# EAGLE board UI PCB - BOARD (EAGLE 9.7.0)
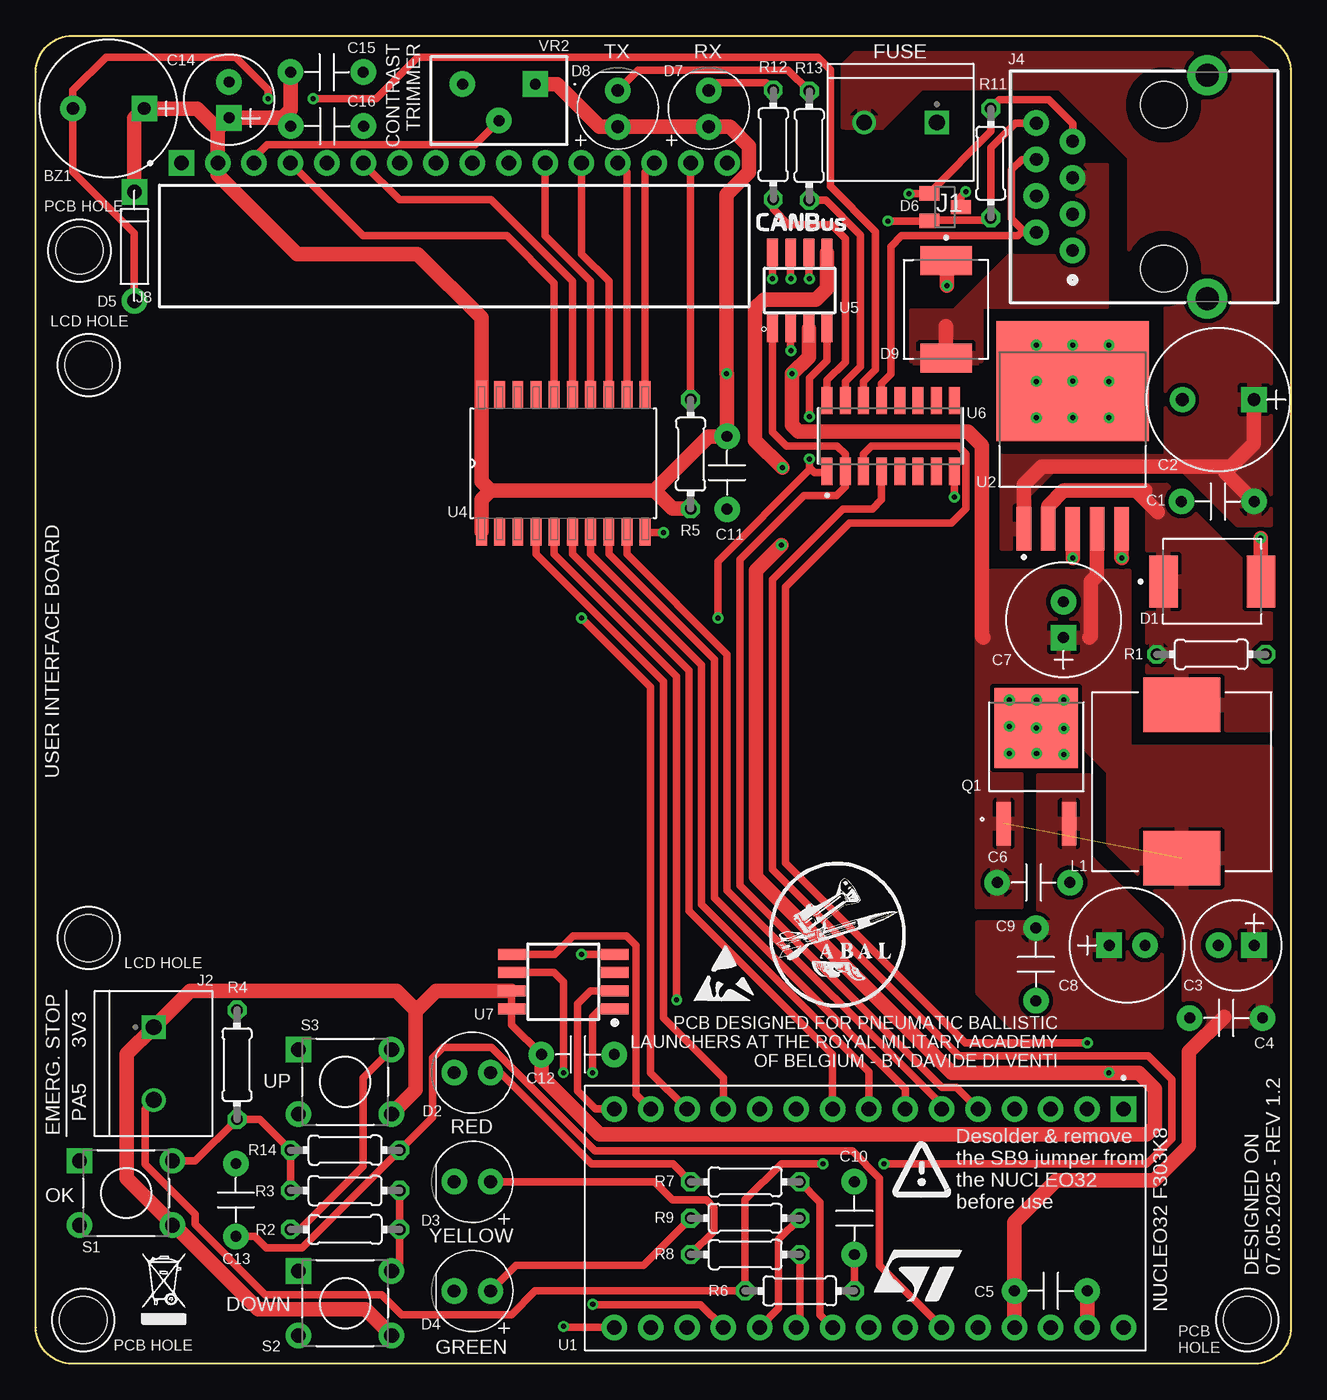
[diagram p0: board, top side]
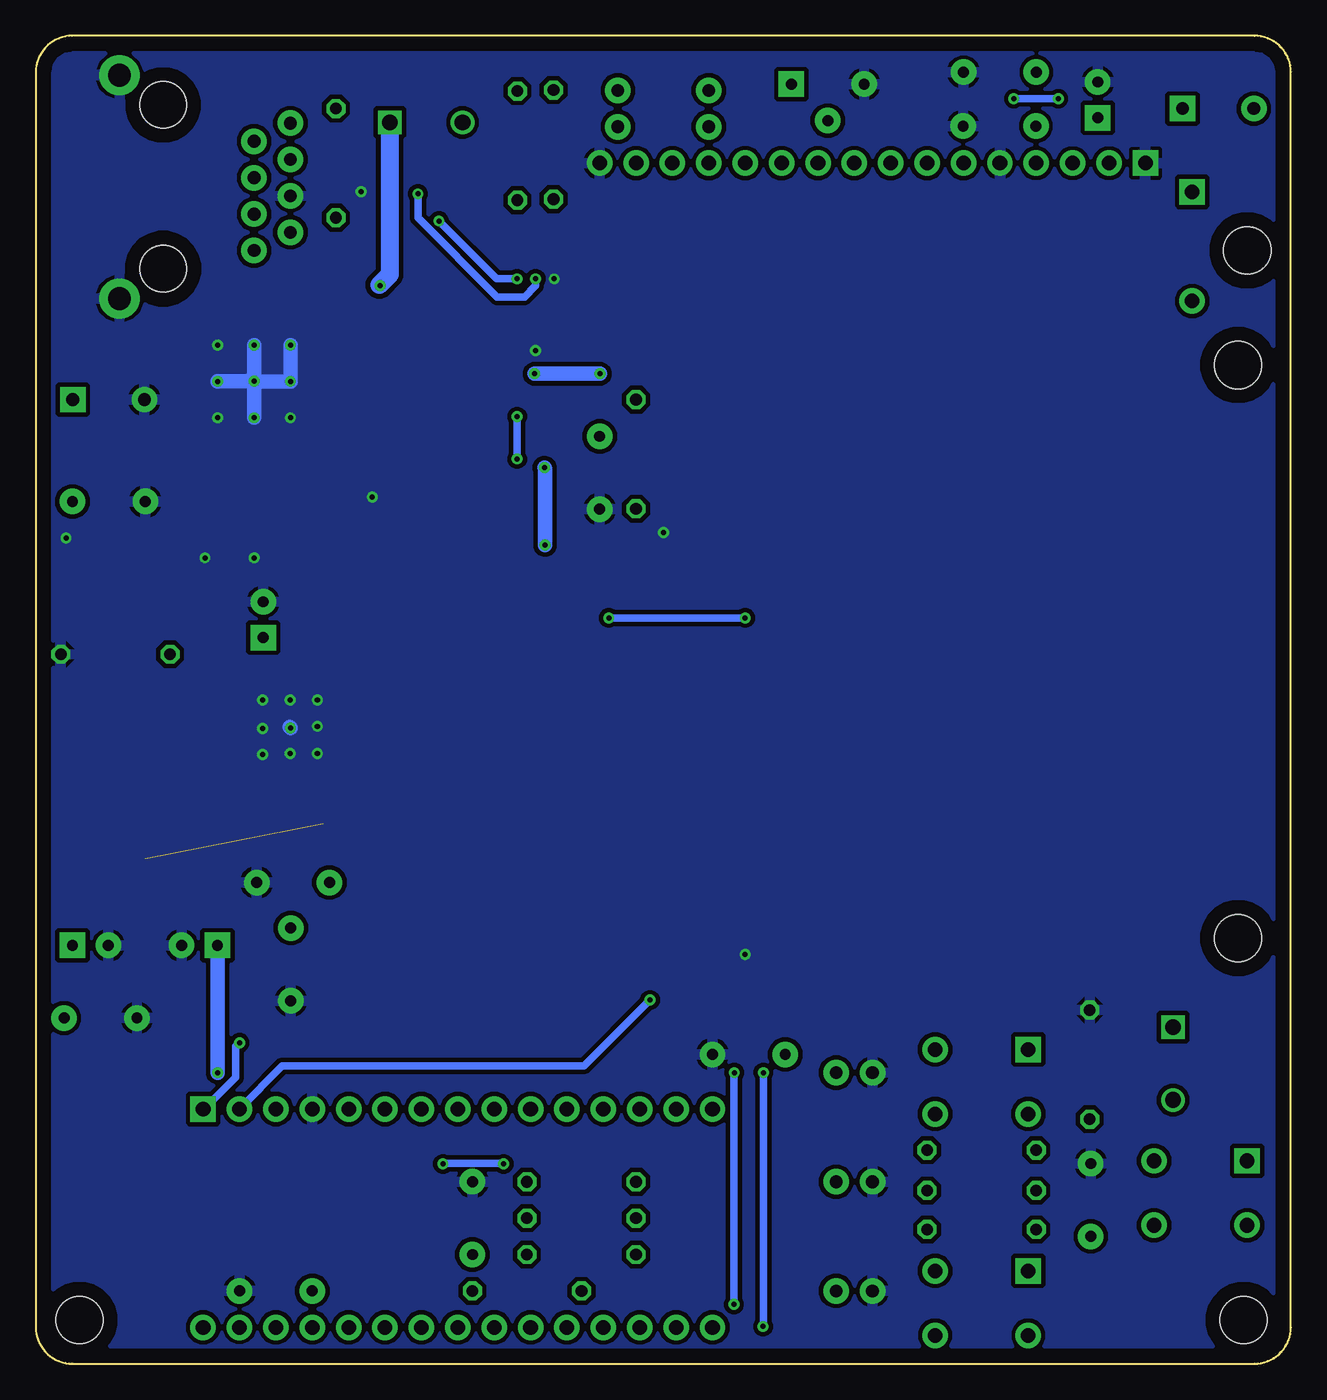
[diagram p1: board, bottom side, seen from below]

Size 87.63 x 92.71 mm. Coordinates in mm from the lower left corner, seen from the top.
Outline: 0,2.54 0,90.17 arc-90 2.54,92.71 85.09,92.71 arc-90 87.63,90.17 87.63,2.54 arc-90 85.09,0 2.54,0 arc-90 0,2.54
Copper layers (1*16): Top / Bottom
Stack-up Default Layer Stack: Top User Defined 0.035mm / Dielectric-1 User Defined 1.5mm / Bottom User Defined 0.035mm
Design rules: minimum copper width 6mil, minimum drill size 0.35mm, copper clearance wire_polygon to wire_polygon 6mil, copper clearance wire_polygon to pad_smd 6mil, copper clearance wire_polygon to via 6mil, copper clearance pad_smd to pad_smd 6mil, copper clearance pad_smd to via 6mil, copper clearance via to via 6mil, copper clearance smd to pad (same net) 6mil, copper clearance smd to via (same net) 6mil, copper clearance smd to smd (same net) 6mil, dimension clearance 40mil, via restrict clearance 0mil, restrict clearance 0mil, drill distance 6mil, keepout clearance 0mil
Holes 3.3 mm at 3.68,29.72 3.68,69.72 84.58,3.05 3.05,77.72 3.3,3.05

## Footprints (pad centres in the part's own frame; a part is rotated, then mirrored left to right if it is on the bottom)
XDCR_KSSG1201-16 = drill 0.889 pad 1.778: N 2.489,0 | drill 0.889 pad 1.778 square: P -2.489,0
CAPRR508W50L508T317H508 = drill 0.762 pad 1.778: 1 -2.54,0; 2 2.54,0
CAPPRD500W60D1000H2000 = drill 0.889 pad 1.778: N 2.5,0 | drill 0.889 pad 1.778 square: P -2.5,0
CAPPRD250W50D630H1120 = drill 0.762 pad 1.778: N 1.25,0 | drill 0.762 pad 1.778 square: P -1.25,0
CAPPRD250W45D800H500 = drill 0.762 pad 1.778: N 1.25,0 | drill 0.762 pad 1.778 square: P -1.25,0
DIO_SS34 = smd 2 x 3.6: A 3.4,0; C -3.4,0
LEDRD254W60D565H860B_R = drill 0.889 pad 1.778: A -1.27,0; C 1.27,0
LEDRD254W60D565H860B_Y = drill 0.889 pad 1.778: A -1.27,0; C 1.27,0
LEDRD254W60D565H860B_W = drill 0.889 pad 1.778: A -1.27,0; C 1.27,0
DIOAD1060W80L520D270 = drill 1.016 pad 1.778: A 3.81,0 | drill 1.016 pad 1.778 square: C -3.81,0
SOT23 = smd 1 x 1.4: 1 -0.95,-1.1; 2 0.95,-1.1; 3 0,1.1
TE_282837-2 = drill 1.1 square: 1 -2.54,0 | drill 1.1: 2 2.54,0
615008140121 = drill 0.889 pad 1.778: 1 -4.445,6.35; 2 -3.175,8.89; 3 -1.905,6.35; 4 -0.635,8.89; 5 0.635,6.35; 6 1.905,8.89; 8 4.445,8.89 | drill 0.9 pad 1.778: 7 3.175,6.35 | drill 1.6 pad 2.794: S1 -7.8,-3.05; S2 7.8,-3.05 | hole 3.25: -5.715,0; 5.715,0
SAMTEC_SSW-116-02-G-S-RA = drill 1.016 pad 1.778 square: 01 0,0 | drill 1.016 pad 1.778: 02 -2.54,0; 03 -5.08,0; 04 -7.62,0; 05 -10.16,0; 06 -12.7,0; 07 -15.24,0; 08 -17.78,0; 09 -20.32,0; 10 -22.86,0; 11 -25.4,0; 12 -27.94,0; 13 -30.48,0; 14 -33.02,0; 15 -35.56,0; 16 -38.1,0
INDP125125X600N = smd 3.81 x 5.4: 1 -5.358,0; 2 5.358,0
DPAK = smd 3.048 x 1.016: 1 -5.47,2.28; 3 -5.47,-2.28 | smd 5.588 x 5.842: 2 1.2,0
0204/7 = drill 0.813 octagon: 1 -3.81,0; 2 3.81,0
SW_FSM8JH = drill 1.016 pad 1.778 square: 1 -3.25,2.25 | drill 1.016 pad 1.778: 2 -3.25,-2.25; 3 3.25,2.25; 4 3.25,-2.25
MODULE_NUCLEO-F042K6 = drill 1.016 pad 1.778 square: CN3_1 -7.62,16.256 | drill 1.016 pad 1.778: CN3_2 -7.62,13.716; CN3_3 -7.62,11.176; CN3_4 -7.62,8.636; CN3_5 -7.62,6.096; CN3_6 -7.62,3.556; CN3_7 -7.62,1.016; CN3_8 -7.62,-1.524; CN3_9 -7.62,-4.064; CN3_10 -7.62,-6.604; CN3_11 -7.62,-9.144; CN3_12 -7.62,-11.684; CN3_13 -7.62,-14.224; CN3_14 -7.62,-16.764; CN3_15 -7.62,-19.304; CN4_1 7.62,16.256; CN4_2 7.62,13.716; CN4_3 7.62,11.176; CN4_4 7.62,8.636; CN4_5 7.62,6.096; CN4_6 7.62,3.556; CN4_7 7.62,1.016; CN4_8 7.62,-1.524; CN4_9 7.62,-4.064; CN4_10 7.62,-6.604; CN4_11 7.62,-9.144; CN4_12 7.62,-11.684; CN4_13 7.62,-14.224; CN4_14 7.62,-16.764; CN4_15 7.62,-19.304
CONV_LM2596DSADJG = smd 3.05 x 1.016: 1 -6.485,3.404; 2 -6.485,1.702; 3 -6.485,0; 4 -6.485,-1.702; 5 -6.485,-3.404 | smd 8.38 x 10.66: 6 3.82,0
SOIC127P1032X265-20N = smd 1.905 x 0.762: 1 -4.775,5.715; 2 -4.775,4.445; 3 -4.775,3.175; 4 -4.775,1.905; 5 -4.775,0.635; 6 -4.775,-0.635; 7 -4.775,-1.905; 8 -4.775,-3.175; 9 -4.775,-4.445; 10 -4.775,-5.715; 11 4.775,-5.715; 12 4.775,-4.445; 13 4.775,-3.175; 14 4.775,-1.905; 15 4.775,-0.635; 16 4.775,0.635; 17 4.775,1.905; 18 4.775,3.175; 19 4.775,4.445; 20 4.775,5.715
SOIC127P600X175-8N = smd 1.905 x 0.762: 1 -2.65,1.905; 2 -2.65,0.635; 3 -2.65,-0.635; 4 -2.65,-1.905; 5 2.65,-1.905; 6 2.65,-0.635; 7 2.65,0.635; 8 2.65,1.905
SOIC127P600X175-16N = smd 1.905 x 0.762: 1 -2.475,4.445; 2 -2.475,3.175; 3 -2.475,1.905; 4 -2.475,0.635; 5 -2.475,-0.635; 6 -2.475,-1.905; 7 -2.475,-3.175; 8 -2.475,-4.445; 9 2.475,-4.445; 10 2.475,-3.175; 11 2.475,-1.905; 12 2.475,-0.635; 13 2.475,0.635; 14 2.475,1.905; 15 2.475,3.175; 16 2.475,4.445
SOIC127P790X216-8N = smd 1.905 x 0.762: 1 -3.6,1.905; 2 -3.6,0.635; 3 -3.6,-0.635; 4 -3.6,-1.905; 5 3.6,-1.905; 6 3.6,-0.635; 7 3.6,0.635; 8 3.6,1.905
3299Y1104LF = drill 0.762 pad 1.778 square: 1 0,0 | drill 0.762 pad 1.778: 2 2.54,-2.54; 3 0,-5.08

## Placement (x,y rotation side)
BZ1  KSSG1201-16  [XDCR_KSSG1201-16]  5.08,87.63 180 top
C1  SR211C104KARTR1  [CAPRR508W50L508T317H508]  82.53,60.2 0 top
C2  ECA2CHG220  [CAPPRD500W60D1000H2000]  82.55,67.31 180 top
C3  EEUFC1E101SH  [CAPPRD250W50D630H1120]  83.82,29.21 180 top
C4  SR211C104KARTR1  [CAPRR508W50L508T317H508]  83.11,24.13 0 top
C5  SR211C104KARTR1  [CAPRR508W50L508T317H508]  70.87,5.08 180 top
C6  SR211C104KARTR1  [CAPRR508W50L508T317H508]  69.67,33.6 180 top
C7  ECEA1VKS470  [CAPPRD250W45D800H500]  71.75,51.94 90 top
C8  ECEA1VKS470  [CAPPRD250W45D800H500]  76.2,29.21 0 top
C9  SR211C104KARTR1  [CAPRR508W50L508T317H508]  69.82,27.88 90 top
C10  SR211C104KARTR1  [CAPRR508W50L508T317H508]  57.15,10.16 270 top
C11  SR211C104KARTR1  [CAPRR508W50L508T317H508]  48.26,62.2 90 top
C12  SR211C104KARTR1  [CAPRR508W50L508T317H508]  37.85,21.59 180 top
C13  SR211C104KARTR1  [CAPRR508W50L508T317H508]  13.97,11.43 270 top
C14  EEUFC1E101SH  [CAPPRD250W50D630H1120]  13.49,88.24 90 top
C15  SR211C104KARTR1  [CAPRR508W50L508T317H508]  20.32,90.17 180 top
C16  SR211C104KARTR1  [CAPRR508W50L508T317H508]  20.35,86.41 180 top
D1  SS34  [DIO_SS34]  82.14,54.61 0 top
D2  LED_RADIALRED  [LEDRD254W60D565H860B_R]  30.48,20.32 180 top
D3  LED_RADIALYELLOW  [LEDRD254W60D565H860B_Y]  30.48,12.7 180 top
D4  LED_RADIALWHITE  [LEDRD254W60D565H860B_W]  30.48,5.08 180 top
D5  1N4007  [DIOAD1060W80L520D270]  6.89,78 270 top
D6  SM712.TCT  [SOT23]  63.47,80.75 270 top
D7  LED_RADIALYELLOW  [LEDRD254W60D565H860B_Y]  46.99,87.63 90 top
D8  LED_RADIALYELLOW  [LEDRD254W60D565H860B_Y]  40.64,87.63 90 top
D9  SS34  [DIO_SS34]  63.55,73.61 270 top
J1  282837-2  [TE_282837-2]  60.38,86.66 180 top
J2  282837-2  [TE_282837-2]  8.23,20.95 270 top
J4  615008140121  [615008140121]  78.74,82.17 90 top
J8  SSW-116-02-G-S-RA  [SAMTEC_SSW-116-02-G-S-RA]  10.16,83.82 180 top
L1  SRR1260-330M  [INDP125125X600N]  80.01,40.64 90 top
Q1  LD39150DT33-R  [DPAK]  69.85,43.18 90 top
R1  10k  [0204/7]  82.07,49.53 0 top
R2  1k  [0204/7]  21.59,9.37 180 top
R3  1k  [0204/7]  21.59,12.09 0 top
R4  4.7k  [0204/7]  14.05,20.88 270 top
R5  330  [0204/7]  45.72,63.5 90 top
R6  1k  [0204/7]  53.34,5.08 180 top
R7  330  [0204/7]  49.53,12.7 0 top
R8  330  [0204/7]  49.53,7.62 0 top
R9  330  [0204/7]  49.53,10.16 0 top
R11  120  [0204/7]  66.67,83.82 270 top
R12  330  [0204/7]  51.49,85.12 90 top
R13  330  [0204/7]  54,85.04 90 top
R14  1k  [0204/7]  21.59,14.91 0 top
S1  FSM8JH  [SW_FSM8JH]  6.3,11.91 0 top
S2  FSM8JH  [SW_FSM8JH]  21.59,4.23 0 top
S3  FSM8JH  [SW_FSM8JH]  21.59,19.68 0 top
U1  NUCLEO-F042K6  [MODULE_NUCLEO-F042K6]  59.69,10.16 270 top
U2  LM2596DSADJG  [CONV_LM2596DSADJG]  72.39,64.77 90 top
U4  74HCT245D  [SOIC127P1032X265-20N]  36.83,62.87 90 top
U5  MCP2562-E/SN  [SOIC127P600X175-8N]  53.34,74.93 90 top
U6  ULN2003LVDR  [SOIC127P600X175-16N]  59.69,64.77 90 top
U7  W25Q32JVSSIQ  [SOIC127P790X216-8N]  36.83,26.67 180 top
VR2  3299Y-1-104LF  [3299Y1104LF]  34.87,89.33 270 top

## Library data of the parts
BZ1 = Buzzer; AVAILABILITY: In Stock; CHECK_PRICES: https://www.snapeda.com/parts/KSSG1201-16/Kingstate/view-part/?ref=eda; DESCRIPTION: MAGNETIC TRANSDUCER, PCB; Transducer Function:Buzzer; Supply Voltage Min:1V; Supply Voltage Max:-; Current Rating:35mA; Tones:-; Sound Level SPL:85dB; Resonant Frequency:2kHz; Transducer Mounting:-; Product Range:-; SVHC:No SVHC RoHS Compliant: Yes; MF: Kingstate; MP: KSSG1201-16; PACKAGE: None; PRICE: None; SNAPEDA_LINK: https://www.snapeda.com/parts/KSSG1201-16/Kingstate/view-part/?ref=snap
C1 C4-C6 C9-C13 C15 C16 = 100nF; AVAILABILITY: In Stock; CHECK_PRICES: https://www.snapeda.com/parts/SR211C104KARTR1/AVX/view-part/?ref=eda; DESCRIPTION: 0.1 µF ±10% 100V Ceramic Capacitor X7R Radial; MF: AVX; MP: SR211C104KARTR1; PACKAGE: Radial AVX Interconnect / Elco; PRICE: None; SNAPEDA_LINK: https://www.snapeda.com/parts/SR211C104KARTR1/AVX/view-part/?ref=snap
C2 = 680uF 35V; AVAILABILITY: In Stock; CHECK_PRICES: https://www.snapeda.com/parts/ECA2CHG220/Panasonic/view-part/?ref=eda; DESCRIPTION: Capacitor; Alum Electrolytic; Cap 22 uF; Tol 20%; Vol-Rtg 160 VDC; Radial; 10x20; Bulk; MF: Panasonic; MP: ECA2CHG220; PACKAGE: RADIAL-2 Panasonic; PRICE: None; SNAPEDA_LINK: https://www.snapeda.com/parts/ECA2CHG220/Panasonic/view-part/?ref=snap
C3 C14 = 220uF 10V; AVAILABILITY: In Stock; CHECK_PRICES: https://www.snapeda.com/parts/EEU-FC1E101SH/Panasonic/view-part/?ref=eda; DESCRIPTION: Capacitor,Alum Lytic,Cap 100 uF,Tol 20%,Vol-Rtg 25 VDC,Radial,6.3x11,Tape&Box | Panasonic Electronic Components EEU-FC1E101SH; MF: Panasonic; MP: EEU-FC1E101SH; PACKAGE: RADIAL-2 Panasonic; PRICE: None; SNAPEDA_LINK: https://www.snapeda.com/parts/EEU-FC1E101SH/Panasonic/view-part/?ref=snap
C7 C8 = 100uF 25V; AVAILABILITY: In Stock; CHECK_PRICES: https://www.snapeda.com/parts/ECE-A1VKS470/Panasonic/view-part/?ref=eda; DESCRIPTION: Capacitor,Alum Electrolytic,Cap 47 uF,Tol 20%,Vol-Rtg 35 VDC,Radial,8x5,Bulk | Panasonic Electronic Components ECE-A1VKS470; MF: Panasonic; MP: ECE-A1VKS470; PACKAGE: RADIAL-2 Panasonic; PRICE: None; SNAPEDA_LINK: https://www.snapeda.com/parts/ECE-A1VKS470/Panasonic/view-part/?ref=snap
D1 D9 = SS34; AVAILABILITY: In Stock; CHECK_PRICES: https://www.snapeda.com/parts/SS34/taiwan/view-part/?ref=eda; DESCRIPTION: 3A, 40V, Schottky Rectifier; MF: Taiwan Semiconductor; MP: SS34; PACKAGE: DO-214AB-2 Taiwan Semiconductor; PRICE: None; SNAPEDA_LINK: https://www.snapeda.com/parts/SS34/taiwan/view-part/?ref=snap
D2-D4 D7 D8 = LED
D5 = 1N4007; AVAILABILITY: In Stock; CHECK_PRICES: https://www.snapeda.com/parts/1N4007/Diotec/view-part/?ref=eda; DESCRIPTION: Diode, DO-41, 1000V, 1A, 175°C; MF: Diotec Semiconductor; MP: 1N4007; PACKAGE: DO-41 Diotec; PRICE: None; SNAPEDA_LINK: https://www.snapeda.com/parts/1N4007/Diotec/view-part/?ref=snap
D6 = SM712; AVAILABILITY: In Stock; CHECK_PRICES: https://www.snapeda.com/parts/SM712.TCT/Semtech/view-part/?ref=eda; DESCRIPTION: SM Series 12 V 400 W Asymmetrical TVS Diode for Extended Common-Mode - SOT-23; MF: Semtech Corporation; MP: SM712.TCT; PACKAGE: SOT-23 Semtech; PRICE: None; SNAPEDA_LINK: https://www.snapeda.com/parts/SM712.TCT/Semtech/view-part/?ref=snap
J1 J2 = 282837-2; AVAILABILITY: In Stock; CHECK_PRICES: https://www.snapeda.com/parts/282837-2/TE+Connectivity+AMP+Connectors/view-part/?ref=eda; COMMENT: 282837-2; DESCRIPTION: Terminal Block Connector Wire Receptacle 2 5.08 mm 30-16 AWG Green 13.5 A 250 V | TE Connectivity 282837-2; MF: TE Connectivity; MP: 282837-2; PACKAGE: None; PRICE: None; SNAPEDA_LINK: https://www.snapeda.com/parts/282837-2/TE+Connectivity+AMP+Connectors/view-part/?ref=snap
J4 = Ethernet connector; AVAILABILITY: In Stock; CHECK_PRICES: https://www.snapeda.com/parts/615008140121/Wurth+Electronics/view-part/?ref=eda; DESCRIPTION: ModularJack_8P8C_THT_Horizontal_Shielded_Tab Down; MF: Wurth Elektronik; MP: 615008140121; PACKAGE: None; PRICE: None; SNAPEDA_LINK: https://www.snapeda.com/parts/615008140121/Wurth+Electronics/view-part/?ref=snap
J8 = Header 16 positions right angle; AVAILABILITY: In Stock; CHECK_PRICES: https://www.snapeda.com/parts/SSW-116-02-G-S-RA/Samtec+Inc./view-part/?ref=eda; DESCRIPTION: 16 Position Receptacle Connector 0.100 (2.54mm) Through Hole, Right Angle Gold; MF: Samtec Inc.; MP: SSW-116-02-G-S-RA; PACKAGE: None; PRICE: None; SNAPEDA_LINK: https://www.snapeda.com/parts/SSW-116-02-G-S-RA/Samtec+Inc./view-part/?ref=snap
L1 = 33uH 3A; AVAILABILITY: In Stock; CHECK_PRICES: https://www.snapeda.com/parts/SRR1260-330M/Bourns/view-part/?ref=eda; DESCRIPTION: 33 µH Shielded Drum Core, Wirewound Inductor 3 A 60mOhm Max Nonstandard; MF: Bourns - J.W. Miller; MP: SRR1260-330M; PACKAGE: Nonstandard Bourns - J.W. Miller; PRICE: None; SNAPEDA_LINK: https://www.snapeda.com/parts/SRR1260-330M/Bourns/view-part/?ref=snap
Q1 = 3V3 regulator; AVAILABILITY: In Stock; CHECK_PRICES: https://www.snapeda.com/parts/IPB60R165CP/Infineon/view-part/?ref=eda; DESCRIPTION: N-Channel 600 V 21A (Tc) 192W (Tc) Surface Mount PG-TO263-3-2; MF: Infineon; MP: IPB60R165CP; PACKAGE: TO-263 Infineon; PRICE: None; SNAPEDA_LINK: https://www.snapeda.com/parts/IPB60R165CP/Infineon/view-part/?ref=snap
R1-R9 R11-R14 = rcl; SPICEPREFIX: R
S1-S3 = Button; AVAILABILITY: In Stock; CHECK_PRICES: https://www.snapeda.com/parts/FSM8JH/TE+Connectivity+ALCOSWITCH+Switches/view-part/?ref=eda; DESCRIPTION: Switch,Pushbutton,Tactile,SPST,Thru Hole,Vertical,6MM,Black | TE Connectivity FSM8JH; MF: TE Connectivity; MP: FSM8JH; PACKAGE: None; PRICE: None; SNAPEDA_LINK: https://www.snapeda.com/parts/FSM8JH/TE+Connectivity+ALCOSWITCH+Switches/view-part/?ref=snap
U1 = NUCLEO-F303K8; AVAILABILITY: In Stock; CHECK_PRICES: https://www.snapeda.com/parts/NUCLEO-F042K6/STMicroelectronics/view-part/?ref=eda; DESCRIPTION: STM32F042K6, mbed-Enabled Development Nucleo-32 STM32F0 ARM® Cortex®-M0 MCU 32-Bit Embedded Evaluation Board; MF: STMicroelectronics; MP: NUCLEO-F042K6; PACKAGE: None; PRICE: None; SNAPEDA_LINK: https://www.snapeda.com/parts/NUCLEO-F042K6/STMicroelectronics/view-part/?ref=snap
U2 = LM2596; AVAILABILITY: In Stock; CHECK_PRICES: https://www.snapeda.com/parts/LM2596DSADJG/Onsemi/view-part/?ref=eda; DESCRIPTION: LM2596DSADJG Switching Regulator 3A Adjustable, 1.23 to 37 V, 5-Pin D2PAK | ON Semiconductor LM2596DSADJG; MF: ON Semiconductor; MP: LM2596DSADJG; PACKAGE: D2PAK-5 ON Semiconductor; PRICE: None; SNAPEDA_LINK: https://www.snapeda.com/parts/LM2596DSADJG/Onsemi/view-part/?ref=snap
U4 = 74HCT245D; AVAILABILITY: In Stock; CHECK_PRICES: https://www.snapeda.com/parts/74HCT245D/Toshiba/view-part/?ref=eda; DESCRIPTION: Transceiver, Non-Inverting 1 Element 8 Bit per Element 3-State Output 20-SOIC; MF: Toshiba; MP: 74HCT245D; PACKAGE: SO-20 NXP Semiconductors; PRICE: None; SNAPEDA_LINK: https://www.snapeda.com/parts/74HCT245D/Toshiba/view-part/?ref=snap
U5 = MCP2562; AVAILABILITY: In Stock; CHECK_PRICES: https://www.snapeda.com/parts/MCP2562-E/SN/Microchip/view-part/?ref=eda; DESCRIPTION: Microchip MCP2562-E/SN,CAN Transceiver 1MBps 1-channel IEC 61000-4-2,8-Pin SOIC | Microchip Technology Inc. MCP2562-E/SN; MF: Microchip; MP: MCP2562-E/SN; PACKAGE: SO-8 Microchip; PRICE: None; SNAPEDA_LINK: https://www.snapeda.com/parts/MCP2562-E/SN/Microchip/view-part/?ref=snap
U6 = ULN2003; AVAILABILITY: In Stock; CHECK_PRICES: https://www.snapeda.com/parts/ULN2003LVDR/Texas+Instruments/view-part/?ref=eda; DESCRIPTION: 50-V, 7-ch NMOS array low-side driver; MF: Texas Instruments; MP: ULN2003LVDR; PACKAGE: SOIC-16 Texas Instruments; PRICE: None; SNAPEDA_LINK: https://www.snapeda.com/parts/ULN2003LVDR/Texas+Instruments/view-part/?ref=snap
U7 = W25Q32; AVAILABILITY: In Stock; CHECK_PRICES: https://www.snapeda.com/parts/W25Q32JVSSIQ/Winbond/view-part/?ref=eda; DESCRIPTION: FLASH - NOR Memory IC 32Mb (4M x 8) SPI - Quad I/O 133 MHz 8-SOIC; MF: Winbond; MP: W25Q32JVSSIQ; PACKAGE: SOIC-8 Winbond; PRICE: None; SNAPEDA_LINK: https://www.snapeda.com/parts/W25Q32JVSSIQ/Winbond/view-part/?ref=snap
VR2 = Trimmer 10k; AVAILABILITY: In Stock; CHECK_PRICES: https://www.snapeda.com/parts/3299Y-1-104LF/Bourns/view-part/?ref=eda; DESCRIPTION: Trimmer, Cermet, Rest 100 Kilohms, PCB, 25 Turns, Pwr-Rtg 0.5W | Bourns 3299Y-1-104LF; MF: Bourns; MP: 3299Y-1-104LF; PACKAGE: DIP-3 Bourns; PRICE: None; SNAPEDA_LINK: https://www.snapeda.com/parts/3299Y-1-104LF/Bourns/view-part/?ref=snap

## Nets
24V: C1.2 C2.P J1.2 U2.1
+3.3V: C8.P C9.2 C12.2 J2.1 Q1.3 S1.4 S2.4 S3.4 U5.5 U7.7 U7.8
+3V3: U1.CN4_14
+5V: BZ1.P C3.P C4.2 C5.2 C6.2 C7.P C11.2 C14.P C15.2 C16.2 D5.C D7.A D8.A J8.02 L1.1 Q1.1 R5.1 U1.CN4_4 U2.4 U4.1 U4.20 U5.3 VR2.1
+24V: D9.A J4.5
BUZZER: BZ1.N D5.A U6.14
CANH: D6.1 J4.7 R11.1 U5.7
CANL: D6.2 J4.8 R11.2 U5.6
EM.STOP: J4.2 J4.6 U6.13
GND: C1.1 C2.N C3.N C4.1 C5.1 C6.1 C7.N C8.N C9.1 C10.1 C11.1 C12.1 C13.1 C14.N C15.1 C16.1 D1.A D2.C D3.C D4.C D6.3 J4.4 J4.S1 J4.S2 J8.01 J8.05 J8.16 Q1.2 R1.2 R4.1 U1.CN3_4 U1.CN4_2 U2.3 U2.5 U2.6 U4.10 U5.2 U5.8 U6.8 U7.4 VR2.3
INT2: J4.3
INT4: J4.1
N$1: C10.2 R6.1
N$2: D1.C L1.2 R1.1 U2.2
N$3: J8.14 U4.11
N$4: J8.13 U4.12
N$5: J8.12 U4.13
N$6: J8.11 U4.14
N$7: J8.06 U4.15
N$8: R2.2 S3.3
N$9: J8.04 U4.16
N$10: R3.1 R4.2 R14.1 S1.3
N$12: R2.1 R3.2 S2.3
N$13: D9.C J1.1
N$17: U4.19
N$18: J8.03 VR2.2
N$19: J8.15 R5.2
N$20: R13.1 U6.15
N$21: D2.A R7.1
N$22: D4.A R9.1
N$23: D3.A R8.1
N$34: R12.1 U6.16
N$36: D7.C R12.2
N$37: D8.C R13.2
PA0-W25Q32-CS: U1.CN4_12 U7.1
PA1_LED-GREEN: R9.2 U1.CN4_11
PA3_LED-YELLOW: R8.2 U1.CN4_10
PA4_LED-RED: R7.2 U1.CN4_9
PA5_BUTTON-EM.STOP: J2.2 R6.2 U6.4
PA7_BUTTONS: C13.2 R14.2 U1.CN4_6
PA8_LCD-RS: U1.CN3_12 U4.4
PA9_BUZZER: U1.CN3_1 U6.3
PA10_LCD-E: U1.CN3_2 U4.5
PA11_CANRX: U1.CN3_13 U5.4 U6.1
PA12_CANTX: U1.CN3_5 U5.1 U6.2
PB0_LCD-DB7: U1.CN3_6 U4.9
PB1_LCD-DB4: U1.CN3_9 U4.6
PB3_SCLK: U1.CN4_15 U7.6
PB4_MOSI: U1.CN3_15 U7.2
PB5_MISO: U1.CN3_14 U7.5
PB6_LCD-DB5: U1.CN3_8 U4.7
PB7_LCD-DB6: U1.CN3_7 U4.8
VIN: U1.CN4_1

## Tracks (layer width: path | path; a pad name or v marks a point on that pad's centre or on a via)
24V
  Top 1.016: 85.07,67.29 C2.P 85.05,64.24 83.44,62.64 | U2.1 68.99,61.37 70.26,62.64 83.44,62.64 | C1.2 83.04,62.23 83.44,62.64
  pour Top (isolate 0.305): 72.39,88.9 61.9,88.9 59.18,86.18 56.21,86.18 56.21,90.73 57.18,91.69 72.39,91.69
  pour Top (isolate 0.305): 67.31,56.77 67.31,63.5 78.74,63.5 78.74,73.66 76.2,76.2 76.2,84.12 71.12,89.2 71.12,91.69 84.84,91.69 86.36,90.17 86.36,58.42 83.82,58.42 80.01,62.23 71.12,62.23 69.47,60.58 69.47,56.77
+3.3V  (via drill 0.35)
  Top 0.508: U7.7 U7.8 33.23,23.67 C12.2
  Top 1.016: C12.2 35.31,20.07 39.37,16 77.57,16 78.13,16.57 78.13,19.2 77.01,20.32 v74.93,20.32 63.96,20.32 50.29,33.98 50.29,55.37 v52.07,57.15 | v52.12,62.56 50.22,64.47 50.22,73.69 50.83,74.3 54.48,74.3 55.24,75.06 U5.5 | U7.7 27.94,26.04 26.52,24.61 | S3.4 26.52,19.11 26.52,24.61 | 26.52,24.61 26.52,24.71 25.2,26.04 10.77,26.04 J2.1 6.35,21.61 6.35,12.93 9.55,9.73 S1.4 9.67,9.66 15.52,3.81 23.01,3.81 S2.4
  Bottom 1.016: v52.07,57.15 52.07,62.51 v52.12,62.56 | C8.P 74.93,29.19 v74.93,20.32
  pour Top (isolate 0.305): 73.66,41.22 69.85,41.22 69.85,30.94 65.61,30.94 65.61,25.83 68.1,23.34 78.74,23.34 78.74,30.48 73.66,35.56
+5V  (via drill 0.35)  (1 unrouted)
  Top 0.508: 82.27,35.28 L1.1
  Top 1.016: R5.1 44.45,59.69 43.18,60.96 | 43.18,60.96 31.75,60.96 | 31.75,60.96 31.11,60.33 U4.1 | 31.75,60.96 31.11,61.59 U4.20 31.11,73.03 26.67,77.47 18.24,77.47 12.7,83.01 J8.02 12.7,86.2 | 43.18,60.96 46.97,64.75 C11.2 48.26,69.09 v48.23,69.11 48.23,81.6 49.81,83.18 49.81,85.01 48.46,86.36 D7.A D8.A 39.37,86.36 36.4,89.33 VR2.1 | 82.96,24.21 80.52,21.76 80.52,15.21 78.11,12.8 71.25,12.8 68.33,9.88 C5.2 U1.CN4_4 | U5.3 53.98,70.28 v52.81,69.11 52.81,65.53 53.26,65.08 65.08,65.08 66.04,64.11 66.04,50.8 66.15,50.69 | U2.4 74.09,55.04 73.66,54.61 73.66,50.8 73.55,50.69 | 13.53,86.94 C14.P | C14.P 12.7,86.2 | 12.7,86.2 11.27,87.63 BZ1.P 6.89,86.95 D5.C | C14.P 17.23,86.99 | 17.23,86.99 C16.2 | C15.2 17.78,87.54 17.23,86.99
  Bottom 1.016: v52.81,69.11 v48.23,69.11
  pour Top (isolate 0.305): 74.75,36.2 80.01,30.94 80.01,23.39 86.36,23.39 86.36,43.18 74.75,43.18
  pour Top (isolate 0.305): 65.56,55.47 76.5,55.47 76.5,44.12 68.96,44.12 68.96,31.75 65.56,31.75
  pour Top (isolate 0.305): 76.5,44.45 76.5,40.64 75.34,40.64 73.1,42.88 73.1,44.45
+24V
  Top 1.016: 63.55,72.44 D9.A
  pour Top (isolate 0.305): 72.39,83.82 74.93,83.82 74.93,73.66 66.14,73.66 66.14,69.85 60.99,69.85 60.99,73.66 64.06,73.66 67.87,77.47 72.39,77.47
BUZZER  (via drill 0.35)
  Top 0.508: U6.14 57.78,68.58 58.62,69.42 58.62,79.05 55.47,82.19 55.47,90.35 54.61,91.21 26.67,91.21 23.77,88.32 v19.36,88.32 | D5.A 6.89,78.91 2.59,83.21 BZ1.N 2.59,88.9 4.9,91.21 13.97,91.21 16.23,88.95 v16.23,88.32
  Bottom 0.508: v16.23,88.32 v19.36,88.32
CANH  (via drill 0.35)
  Top 0.508: v60.95,81.67 60.98,81.7 D6.1 62.38,81.74 66.67,86.04 R11.1 67.28,88.24 70.71,88.24 72.39,86.56 J4.7 | U5.7 52.7,75.77 v52.73,75.74
  Bottom 0.508: v52.73,75.74 52.73,75.26 53.52,74.47 55.42,74.47 60.95,80 v60.95,81.67
CANL  (via drill 0.35)
  Top 0.508: J4.8 68.38,86.61 66.67,84.91 R11.2 66.5,79.84 62.42,79.84 D6.2 62.36,79.78 v59.49,79.78 | U5.6 53.98,75.79 v54.03,75.74
  Bottom 0.508: v54.03,75.74 55.45,75.74 v59.49,79.78
EM.STOP
  Top 0.508: J4.6 68.83,84.07 68.12,83.36 68.12,79.93 69.06,78.99 J4.2 68.83,78.99 68.58,78.74 60.43,78.74 59.69,78 59.69,69.08 59.05,68.44 U6.13
GND  (via drill 0.35)
  Top 0.508: U4.10 42.55,58.04 v43.81,58.04 | 52.73,72.25 U5.2 52.7,70.76 v52.73,70.74 | U7.4 v38.1,28.57 | v64.92,81.84 64.58,81.49 D6.3 | v64.14,60.5 U6.8 | v51.44,75.74 U5.8
  Top 1.016: U2.3 v72.39,56.26 | 85.95,53.34 85.98,53.34 85.98,54.17 D1.A 85.52,54.63 v85.52,57.63 | 73.67,67.31 U2.6 | U2.6 v74.93,71.12 | U2.6 v69.85,66.05 v69.85,66.04 | U2.6 v74.93,66.05 v74.93,66.04 | U2.5 75.79,56.29 v75.82,56.26 | 69.78,44.45 Q1.2 | C5.1 U1.CN4_2
  Bottom 1.016: U2.6 v74.92,68.59 v74.93,68.58 | U2.6 v69.85,68.58 v69.85,71.12 | U2.6 v72.39,71.12 | U2.6 v72.39,66.04 | Q1.2 69.92,44.45
  other vias: 72.39,68.59 71.78,42.55 69.88,42.6 67.97,42.6 67.97,44.5 69.85,44.38 71.78,44.35 71.78,46.33 69.88,46.33 67.97,46.33
  pour Bottom (isolate 0.305): 2.54,0 arc-90 0,2.54 0,90.17 arc-90 2.54,92.71 85.09,92.71 arc-90 87.63,90.17 87.63,2.54 arc-90 85.09,0
N$1
  Top 0.508: C10.2 R6.1
N$2
  Top 1.016: L1.2 79.73,45.72 | L1.2 78.46,46 | L1.2 80.01,46.51 | D1.C 78.58,54.46 | 76.83,60.96 77.47,60.96 | 76.83,60.96 71.75,60.96 70.69,59.89 U2.2 | 76.83,60.96 78.34,59.45
  pour Top (isolate 0.305): 82.55,44.07 77.47,46.99 82.55,46.99
  pour Top (isolate 0.305): 86.36,44.12 77.47,44.12 77.47,60.5 71.7,60.5 71.7,61.49 79.02,61.49 86.36,54.15
N$3
  Top 0.508: U4.11 42.55,83.19 J8.14
N$4
  Top 0.508: U4.12 41.27,83.19 J8.13
N$5
  Top 0.508: U4.13 40.01,75.56 38.1,77.47 J8.12
N$6
  Top 0.508: U4.14 38.73,75.56 35.56,78.74 J8.11
N$7
  Top 0.508: U4.15 37.47,75.56 31.77,81.25 25.4,81.25 22.86,83.8 J8.06
N$8
  Top 0.508: R2.2 18.47,9.37 22.86,13.77 22.86,19.95 S3.3
N$9
  Top 0.508: U4.16 36.2,75.44 32.89,78.74 22.86,78.74 J8.04
N$10
  Top 0.508: R3.1 R14.1 15.62,17.07 R4.2 11.14,14.16 S1.3
N$12
  Top 0.508: R3.2 R2.1 25.4,7.04 S2.3
N$13  (via drill 0.35)
  Top 1.016: v63.6,75.26 63.6,76.96 D9.C
  Bottom 1.016: 63.65,75.31 v63.6,75.26
  Bottom 1.27: J1.1 62.92,76.05 63.65,75.31
N$18
  Top 0.508: J8.03 15.24,84.2 16.15,85.11 30.66,85.11 VR2.2
N$19
  Top 0.508: J8.15 R5.2
N$20
  Top 0.508: U6.15 56.52,68.56 57.58,69.62 57.58,78.8 55.15,81.23 R13.1
N$21
  Top 0.508: D2.A 32.44,20.32 38.81,13.95 44.48,13.95 R7.1
N$22
  Top 0.508: R9.1 42.42,6.86 33.53,6.86 D4.A
N$23
  Top 0.508: R8.1 47.35,9.25 47.35,10.9 46.81,11.43 44.45,11.43 43.18,12.7 D3.A
N$34
  Top 0.508: U6.16 55.24,68.66 56.52,69.93 56.52,78.55 55.54,79.52 52.56,79.52 51.49,80.59 R12.1
N$36
  Top 0.508: D7.C 47.52,89.43 50.98,89.43 R12.2
N$37
  Top 0.508: R13.2 52.53,90.32 42.06,90.32 D8.C
PA0-W25Q32-CS  (via drill 0.35)
  Top 0.508: U7.1 39.42,24.77 38.86,24.21 v38.86,20.32 | v38.89,4.14 38.9,4.13 46.42,4.13 U1.CN4_12
  Bottom 0.508: v38.86,20.32 38.89,20.3 v38.89,4.14
PA1_LED-GREEN
  Top 0.508: R9.2 51.87,8.69 51.87,3.86 U1.CN4_11
PA3_LED-YELLOW
  Top 0.508: R8.2 53.34,2.79 U1.CN4_10
PA4_LED-RED
  Top 0.508: R7.2 54.76,11.28 54.76,3.4 U1.CN4_9
PA5_BUTTON-EM.STOP  (via drill 0.35)
  Top 0.508: v59.21,13.95 77.57,13.95 79.32,15.7 79.32,19.84 77.67,21.49 64.44,21.49 51.44,34.49 51.44,54.76 56.34,59.66 58.4,59.66 59.05,60.33 U6.4 | v54.97,13.95 54.94,13.97 52.07,13.97 49.53,11.43 R6.2 34.85,5.08 33.2,3.43 25.53,3.43 24.13,4.83 16.02,4.83 11.12,9.72 11.12,10.41 7.62,13.92 7.62,17.8 J2.2
  Bottom 0.508: v59.21,13.95 59.16,13.99 55.02,13.99 v54.97,13.95
PA7_BUTTONS
  Top 0.508: U1.CN4_6 58.9,6.88 58.9,12.96 57,14.86 39.04,14.86 33.05,20.86 31.8,22.1 28.45,22.1 27.69,21.34 27.69,17.2 R14.2 25.4,14.89 18.58,8.08 16.08,8.08 15.27,8.89 C13.2
PA8_LCD-RS
  Top 0.508: U4.4 34.92,56.52 43.81,47.62 43.81,24.13 48.01,19.94 U1.CN3_12
PA9_BUZZER  (via drill 0.35)
  Top 0.508: U6.3 57.78,63.5 58.34,64.06 64.41,64.06 64.95,63.52 64.95,59.69 63.93,58.67 56.79,58.67 52.35,54.23 52.35,34.95 64.9,22.4 v73.41,22.4
  Bottom 0.508: v73.41,22.4 73.66,22.15 73.66,19.99 75.87,17.78 U1.CN3_1
PA10_LCD-E  (via drill 0.35)
  Top 0.508: U4.5 36.2,56.52 44.73,47.98 44.73,25.41 v44.75,25.39
  Bottom 0.508: v44.75,25.39 49.34,20.79 70.42,20.79 73.41,17.8 U1.CN3_2
PA11_CANRX  (via drill 0.35)
  Top 0.508: v38.1,52.07 42.93,47.24 42.93,20.32 U1.CN3_13 | v47.62,52.07 47.62,56.01 54.03,62.41 v54.03,63.17 54.03,62.56 54.36,62.23 55.18,62.23 U6.1 | U5.4 55.24,70.03 54.03,68.81 v54.03,66.11
  Bottom 0.508: v47.62,52.07 v38.1,52.07 | v54.03,66.11 v54.03,63.17
PA12_CANTX
  Top 0.508: U5.1 51.44,65.05 52.41,64.07 55.94,64.07 56.52,63.5 U6.2 56.52,61.23 55.89,60.6 53.62,60.6 49.15,56.13 49.15,33.4 63.27,19.28 64.29,19.28 U1.CN3_5
PB0_LCD-DB7
  Top 0.508: U4.9 41.27,56.52 48.26,49.53 48.26,33.05 63.25,18.06 U1.CN3_6
PB1_LCD-DB4
  Top 0.508: U4.6 37.47,56.52 45.59,48.39 45.59,31.62 55.63,21.59 U1.CN3_9
PB3_SCLK  (via drill 0.35)
  Top 0.508: U7.6 36.2,27.3 36.83,26.67 v36.83,20.32 | U1.CN4_15 36.91,2.54 v36.85,2.6
  Bottom 0.508: v36.83,20.32 36.83,2.62 v36.85,2.6
PB4_MOSI
  Top 0.508: U1.CN3_15 39.09,17.78 37.82,19.05 37.82,25.12 38.73,26.04 U7.2
PB5_MISO
  Top 0.508: U7.5 36.23,28.57 37.52,29.87 41.25,29.87 41.91,29.21 41.91,18.8 U1.CN3_14
PB6_LCD-DB5
  Top 0.508: U4.7 38.73,56.52 46.48,48.77 46.48,32.05 58.17,20.37 U1.CN3_8
PB7_LCD-DB6
  Top 0.508: U4.8 40.01,56.52 47.37,49.15 47.37,32.52 60.71,19.18 U1.CN3_7

## Text on the board
SilkscreenTop: CONTRAST / TRIMMER | FUSE | TX | RX | PCB HOLE | LCD HOLE | USER INTERFACE BOARD | LCD HOLE | 3V3 | PCB DESIGNED FOR PNEUMATIC BALLISTIC / LAUNCHERS AT THE ROYAL MILITARY ACADEMY / OF BELGIUM - BY DAVIDE DI VENTI | PA5 | UP | NUCLEO32 F303K8 | EMERG. STOP | RED | OK | Desolder & remove / the SB9 jumper from / the NUCLEO32 / before use | YELLOW | DESIGNED ON / 07.05.2025 - REV 1.2 | DOWN | PCB HOLE | GREEN | PCB / HOLE